# Altium PCB TSSOP-8 Adaptor.PCBDOC
Units mm, origin at the board's own origin, x right, y up, seen from the top; angles counter-clockwise.
Board outline 50 x 50 mm, 2 copper layers (Top Layer, Bottom Layer); 2 components, 8 nets, 16 pads, 0 vias.
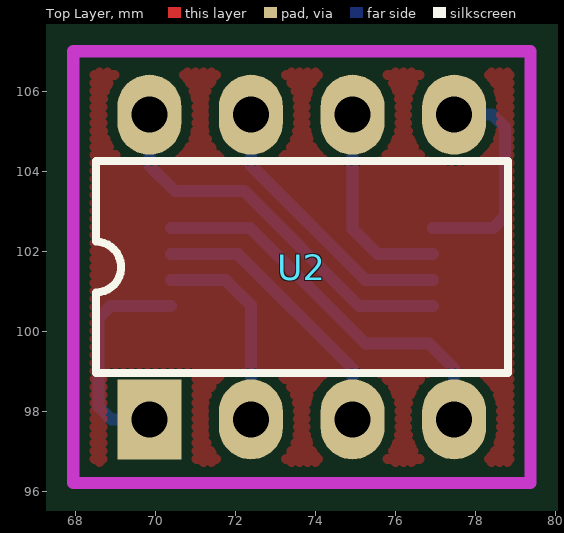
[diagram p0: Top Layer view]
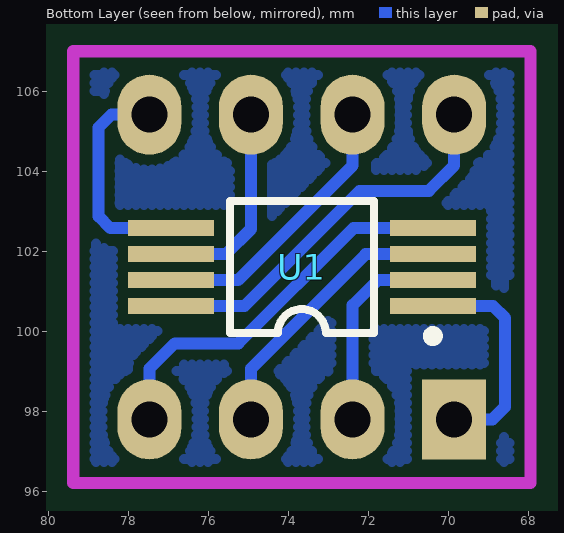
[diagram p1: Bottom Layer view, seen from below]

## Layer stack, top to bottom
Top Layer: signal copper 0.0356
Dielectric: dielectric 0.32, FR-4, Dk 4.8
Bottom Layer: signal copper 0.0356

## Board outline
50.8,76.2 100.8,76.2 100.8,126.2 50.8,126.2

## Design rules (kind name [scope] priority, off if disabled: settings)
Clearance [All] p1: gap=0.25
ComponentClearance [All] p1: gap=0.254 collisioncheckmode=0
PolygonConnect [All] p1: connectstyle=Relief reliefconductorwidth=0.254 reliefentries=4 polygonreliefangle="90 Angle"
RoutingLayers [All] p1: top layer=Horizontal bottom layer=Vertical
RoutingVias [All] p1: holewidth=0.6 width=1.6 viastyle="Through Hole" minholewidth=0.711 minwidth=1.27 maxholewidth=0.711 maxwidth=1.27
SolderMaskExpansion [All] p1: expansion=0.102
TestPointUsage [All] p1: valid=0 allowmultiple=FALSE
Testpoint [All] p1: side=15 testpointundercomponent=TRUE minsize=1.016 maxsize=2.54 preferedsize=1.524 minholesize=0 maxholesize=1.016 preferedholesize=0.813 testpointgrid=0.025 style=1023 order=-539222988
Width [All] p1: maxlimit=0.3 minlimit=0.3 preferedwidth=0.3
16 further rules are at their usual default settings.

## Components (designator, comment, footprint, x,y, rotation, side; value= is the part's Value field where it differs from the comment)
U1 "ADG918" SSO-G8/P.65 73.66,101.6 r90 bottom (schematic designator *)
U2 "ADG918" dip-8 73.66,101.6 r0 top

## Footprints (in the part's own frame and the unit in brackets; to place one, negate y for a bottom-side part, rotate by r counter-clockwise, add the part's x,y. Pads: shape width x height; smd on the part's side, far side on the other; paste and mask are expansions set on the pad)
dip-8 [mm]
  rect 1.6x2 hole 0.9: 1(-3.81,-3.81)
  oval 1.6x2 hole 0.9: 2(-1.27,-3.81) 3(1.27,-3.81) 4(3.81,-3.81) 5(3.81,3.81) 6(1.27,3.81) 7(-1.27,3.81) 8(-3.81,3.81)
  silkscreen extent -5.15,-2.65 5.15,2.65
SSO-G8/P.65 [mm]
  rect 0.4x2.15 smd: 1(-0.975,-3.275) 2(-0.325,-3.275) 3(0.325,-3.275) 4(0.975,-3.275) 5(0.975,3.275) 6(0.325,3.275) 7(-0.325,3.275) 8(-0.975,3.275)
  silkscreen extent -1.85,-3.4 1.65,1.8

## Nets (pads, with @x,y where several pads share a name; then routed paths per layer and width w, separated by ;. In a path a pad name is that pad's centre, name@x,y a point inside that pad or via, vN(x,y) a via of type N, cw(c..) or ccw(c..) an arc to the next point about the centre after c; other vN are vias at no path point)
NetU1_1: U1.1 U2.1 | length 5.6
  Bottom Layer w0.3: U2.1 68.897,97.79 68.58,98.108 68.58,100.33 68.875,100.625 U1.1
NetU1_2: U1.2 U2.2 | length 5.1
  Bottom Layer w0.3: U1.2 71.762,101.275 72.39,100.647 U2.2
NetU1_3: U1.3 U2.3 | length 7
  Bottom Layer w0.3: U1.3 72.065,101.925 74.93,99.06 U2.3
NetU1_4: U1.4 U2.4 | length 9.8
  Bottom Layer w0.3: U1.4 72.367,102.575 75.248,99.695 76.835,99.695 77.47,99.06 U2.4
NetU1_5: U1.5 U2.5 | length 5.6
  Bottom Layer w0.3: U1.5 78.445,102.575 78.74,102.87 78.74,105.093 78.422,105.41 U2.5
NetU1_6: U1.6 U2.6 | length 5.1
  Bottom Layer w0.3: U2.6 74.93,102.552 75.557,101.925 U1.6
NetU1_7: U1.7 U2.7 | length 7
  Bottom Layer w0.3: U2.7 72.39,104.14 75.255,101.275 U1.7
NetU1_8: U1.8 U2.8 | length 9.8
  Bottom Layer w0.3: U2.8 69.85,104.14 70.485,103.505 72.215,103.505 75.095,100.625 U1.8

## Polygon pours and split planes (outlines as drawn)
no net on Top Layer (hatched 90Degree grid 0.2 track 0.25, remove dead copper): 67.945,106.998 79.375,106.998 79.375,96.203 67.945,96.203
no net on Bottom Layer (hatched 90Degree grid 0.2 track 0.25, remove dead copper): 79.375,106.998 79.375,96.203 67.945,96.203 67.945,106.998

## Keep-outs
Keep-Out Layer:
  lines w0.305: 67.945,96.203 79.375,96.203 79.375,106.998 67.945,106.998 67.945,96.203

## Silkscreen, mask and mechanical layers (free items; w line width, h text height)
Drill Drawing:
  text ".LEGEND" at 105.88,81.28 h1.52
  text "Drill Drawing." at 105.88,78.74 h1.52